# Altium PCB LED Controller Panel.PcbDoc
Units mm, origin at the board's own origin, x right, y up, seen from the top; angles counter-clockwise.
Board outline 155 x 103 mm, 2 copper layers (Top Layer, Bottom Layer), stack 1.621 mm thick; 4 components, 0 nets, 8 pads, 0 vias.
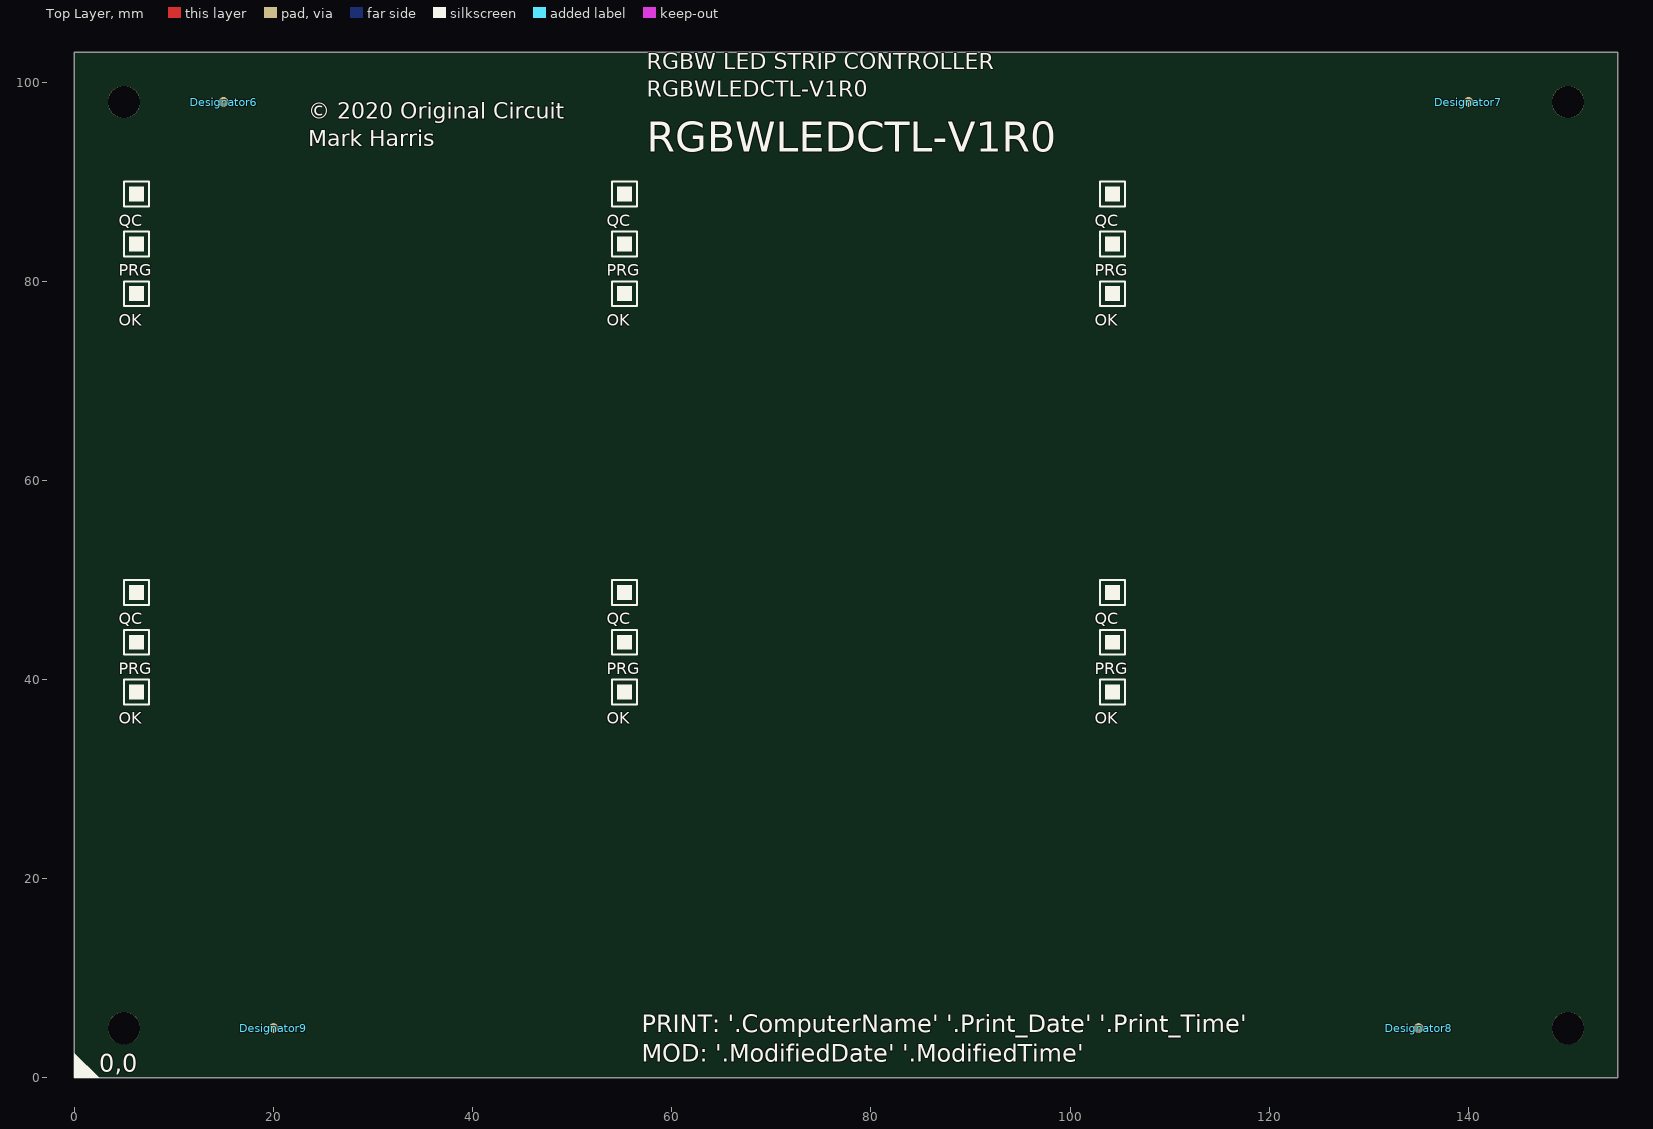
[diagram p0: Top Layer view]
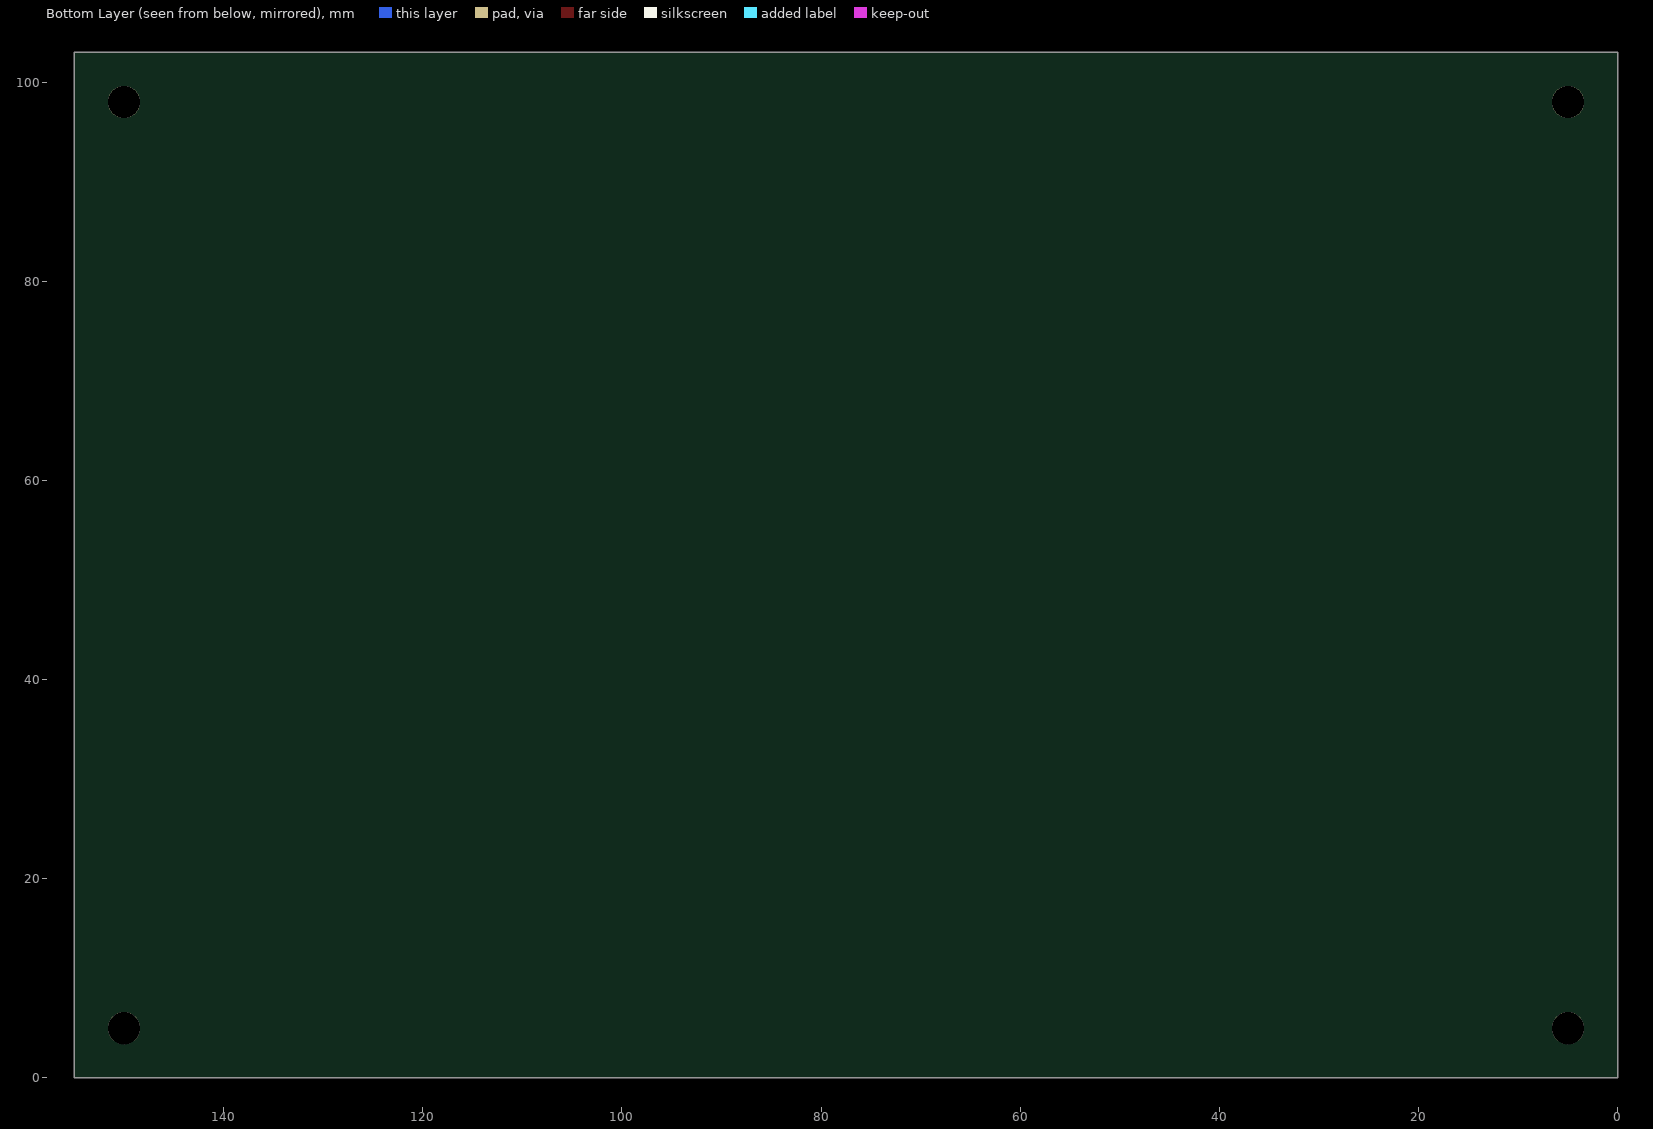
[diagram p1: Bottom Layer view, seen from below]

## Layer stack, top to bottom
Top Solder: solder mask 0.0102, Solder Resist, Dk 3.5
Top Layer: signal copper 0.0356
Dielectric1: core 1.55, FR-4, Dk 4.8
Bottom Layer: signal copper 0.0356
Bottom Solder: solder mask 0.0102, Solder Resist, Dk 3.5

## Board outline
0,0 0,103 155,103 155,0

## Design rules (kind name [scope] priority, off if disabled: settings)
Clearance PadClearance [IsPad vs IsPad] p1: gap=0.2 ignorepadtopadclearanceinfootprint=FALSE except(0: Arc-Hole Track-Hole SMDPad-Hole THPad-Hole Via-Hole Fill-Hole Poly-Hole Region-Hole Text-Hole)
Clearance [All] p2: gap=0.2 ignorepadtopadclearanceinfootprint=FALSE except(0: Arc-Hole Track-Hole SMDPad-Hole THPad-Hole Via-Hole Fill-Hole Poly-Hole Region-Hole Text-Hole)
HoleSize [All] p1: absolutevalues=TRUE maxlimit=6 minlimit=0.4 maxpercent=80.000 minpercent=20.000
HoleToHoleClearance [All] p1: gap=0.2 allowstackedmicrovias=TRUE
MinimumSolderMaskSliver [All] p1: minsoldermaskwidth=0
PolygonConnect ViaConnect [IsVia] p1: connectstyle=Direct reliefconductorwidth=0.254 reliefentries=4 polygonreliefangle="90 Angle" airgapwidth=0.254
PolygonConnect [All] p2: connectstyle=Direct reliefconductorwidth=0.3 reliefentries=4 polygonreliefangle="90 Angle" airgapwidth=0.254
RoutingVias [All] p1: holewidth=0.6 width=1 viastyle="Through Hole" minholewidth=0.4 minwidth=0.8 maxholewidth=5 maxwidth=6
SilkToSilkClearance [All] p1: silktosilkclearance=0
SilkToSolderMaskClearance SilkscreenOverComponentPads [IsPad] p1: minsilkscreentomaskgap=0.05 clearancetoexposedcopper=TRUE
SolderMaskExpansion "Via Tenting" [IsVia] p1: expansion=-2 istentingtop=FALSE
SolderMaskExpansion [All] p2: expansion=0.102 istentingtop=FALSE
Width [All] p1: maxlimit=2 minlimit=0.2 preferedwidth=0.4
25 further rules are at their usual default settings.

## Components (designator, comment, footprint, x,y, rotation, side; value= is the part's Value field where it differs from the comment)
Designator6 "Comment" Fiducial-1mm 15,98 r0 top
Designator7 "Comment" Fiducial-1mm 140,98 r0 top
Designator8 "Comment" Fiducial-1mm 135,5 r0 top
Designator9 "Comment" Fiducial-1mm 20,5 r0 top

## Footprints (in the part's own frame and the unit in brackets; to place one, negate y for a bottom-side part, rotate by r counter-clockwise, add the part's x,y. Pads: shape width x height; smd on the part's side, far side on the other; paste and mask are expansions set on the pad)
Fiducial-1mm [mm]
  round 1 smd paste-1 mask+0.5: F(0,0)
  Top Layer pour cut-out: -1,0 -0.924,0.383 -0.707,0.707 -0.383,0.924 0,1 0,1 0.383,0.924 0.707,0.707 0.924,0.383 1,0 1,0 0.924,-0.383 0.707,-0.707 0.383,-0.924 0,-1 0,-1 -0.383,-0.924 -0.707,-0.707 -0.924,-0.383 -1,0
  Top Layer pour cut-out: 0,0

## Free pads (board coordinates)
  round 3.25 hole 3.25 unplated: M(5,5) M(5,98) M(150,5) M(150,98)

## Nets (pads, with @x,y where several pads share a name; then routed paths per layer and width w, separated by ;. In a path a pad name is that pad's centre, name@x,y a point inside that pad or via, vN(x,y) a via of type N, cw(c..) or ccw(c..) an arc to the next point about the centre after c; other vN are vias at no path point)
pads on no net: Designator6.F Designator7.F Designator8.F Designator9.F

## Silkscreen, mask and mechanical layers (free items; w line width, h text height)
Top Overlay:
  rectangle: 5.5,48 7,49.5
  rectangle: 5.5,43 7,44.5
  rectangle: 5.5,38 7,39.5
  rectangle: 54.5,48 56,49.5
  rectangle: 54.5,43 56,44.5
  rectangle: 54.5,38 56,39.5
  rectangle: 103.5,48 105,49.5
  rectangle: 103.5,43 105,44.5
  rectangle: 103.5,38 105,39.5
  rectangle: 103.5,88 105,89.5
  rectangle: 103.5,83 105,84.5
  rectangle: 103.5,78 105,79.5
  rectangle: 54.5,88 56,89.5
  rectangle: 54.5,83 56,84.5
  rectangle: 54.5,78 56,79.5
  rectangle: 5.5,78 7,79.5
  rectangle: 5.5,83 7,84.5
  rectangle: 5.5,88 7,89.5
  region: 0,2.5 2.5,0 0,0
  lines w0.2: 5,37.5 5,40 7.5,40 7.5,37.5 5,37.5 ; 5,42.5 5,45 7.5,45 7.5,42.5 5,42.5 ; 5,47.5 7.5,47.5 7.5,50 5,50 5,47.5 ; 5,77.5 7.5,77.5 7.5,80 5,80 5,77.5 ; 5,82.5 7.5,82.5 7.5,85 5,85 5,82.5 ; 5,87.5 5,90 7.5,90 7.5,87.5 5,87.5 ; 54,37.5 54,40 56.5,40 56.5,37.5 54,37.5 ; 54,42.5 54,45 56.5,45 56.5,42.5 54,42.5 ; 54,47.5 56.5,47.5 56.5,50 54,50 54,47.5 ; 54,77.5 54,80 56.5,80 56.5,77.5 54,77.5 ; 54,82.5 54,85 56.5,85 56.5,82.5 54,82.5 ; 54,87.5 56.5,87.5 56.5,90 54,90 54,87.5 ; 103,37.5 103,40 105.5,40 105.5,37.5 103,37.5 ; 103,42.5 103,45 105.5,45 105.5,42.5 103,42.5 ; 103,47.5 105.5,47.5 105.5,50 103,50 103,47.5 ; 103,77.5 103,80 105.5,80 105.5,77.5 103,77.5 ; 103,82.5 103,85 105.5,85 105.5,82.5 103,82.5 ; 103,87.5 105.5,87.5 105.5,90 103,90 103,87.5
  text "RGBW LED STRIP CONTROLLER / RGBWLEDCTL-V1R0" at 57.5,98 h2.75
  text "© 2020 Original Circuit / Mark Harris" at 23.5,93 h2.75
  text "RGBWLEDCTL-V1R0" at 57.5,93 h3
  text "QC" at 4.484,85.142 h2
  text "QC" at 53.484,85.142 h2
  text "QC" at 102.484,85.142 h2
  text "PRG" at 4.484,80.142 h2
  text "PRG" at 53.484,80.142 h2
  text "PRG" at 102.484,80.142 h2
  text "OK" at 4.484,75.142 h2
  text "OK" at 53.484,75.142 h2
  text "OK" at 102.484,75.142 h2
  text "QC" at 4.484,45.142 h2
  text "QC" at 53.484,45.142 h2
  text "QC" at 102.484,45.142 h2
  text "PRG" at 4.484,40.142 h2
  text "PRG" at 53.484,40.142 h2
  text "PRG" at 102.484,40.142 h2
  text "OK" at 4.484,35.142 h2
  text "OK" at 53.484,35.142 h2
  text "OK" at 102.484,35.142 h2
  text "PRINT: '.ComputerName' '.Print_Date' '.Print_Time' / MOD: '.ModifiedDate' '.ModifiedTime'" at 57,1 h3
  text "0,0" at 2.5,0 h3
V Cut:
  lines w0.2: 8,-2 8,109 ; 49,-2 49,109 ; 57,-2 57,109 ; 98,-2 98,109 ; 106,-2 106,109 ; 147,-2 147,109
Fab Notes:
  lines w0.2: 8,109 9,110 23,110 ; 34,110 48,110 49,109 ; 57,109 58,110 72,110 ; 83,110 97,110 98,109 ; 106,109 107,110 121,110 ; 147,109 148,110 162,110 ; 148,12 158,12 164,6 184,6 ; 148,52 158,52 164,46 184,46 ; 148,92 158,92 164,86 184,86
  text "THIS IS A DOCUMENTATION LAYER" at 163,119.802 h8
  text "V SCORE" at 10,110 h5
  text "V SCORE" at 34,110 h5
  text "V SCORE" at 59,110 h5
  text "V SCORE" at 83,110 h5
  text "V SCORE" at 108,110 h5
  text "V SCORE" at 149,110 h5
  text "MILLED SLOT" at 165,86 h5
  text "MILLED SLOT" at 165,46 h5
  text "MILLED SLOT" at 165,6 h5
Outlines:
  the board outline again, w0.2

## Dimensions
0,103 to 0,0 on Fab Notes
0,0 to 155,0 on Fab Notes

## Panel: embedded boards
"LED Controller.PcbDoc" at 8,13, 2 rows x 3 columns, spacing 40 x 49, rotation 0